# Altium PCB PCB.PcbDoc
Units mm, origin at the board's own origin, x right, y up, seen from the top; angles counter-clockwise.
Board outline 45 x 45 mm, 2 copper layers (Top Layer, Bottom Layer); 38 components, 25 nets, 182 pads, 104 vias.
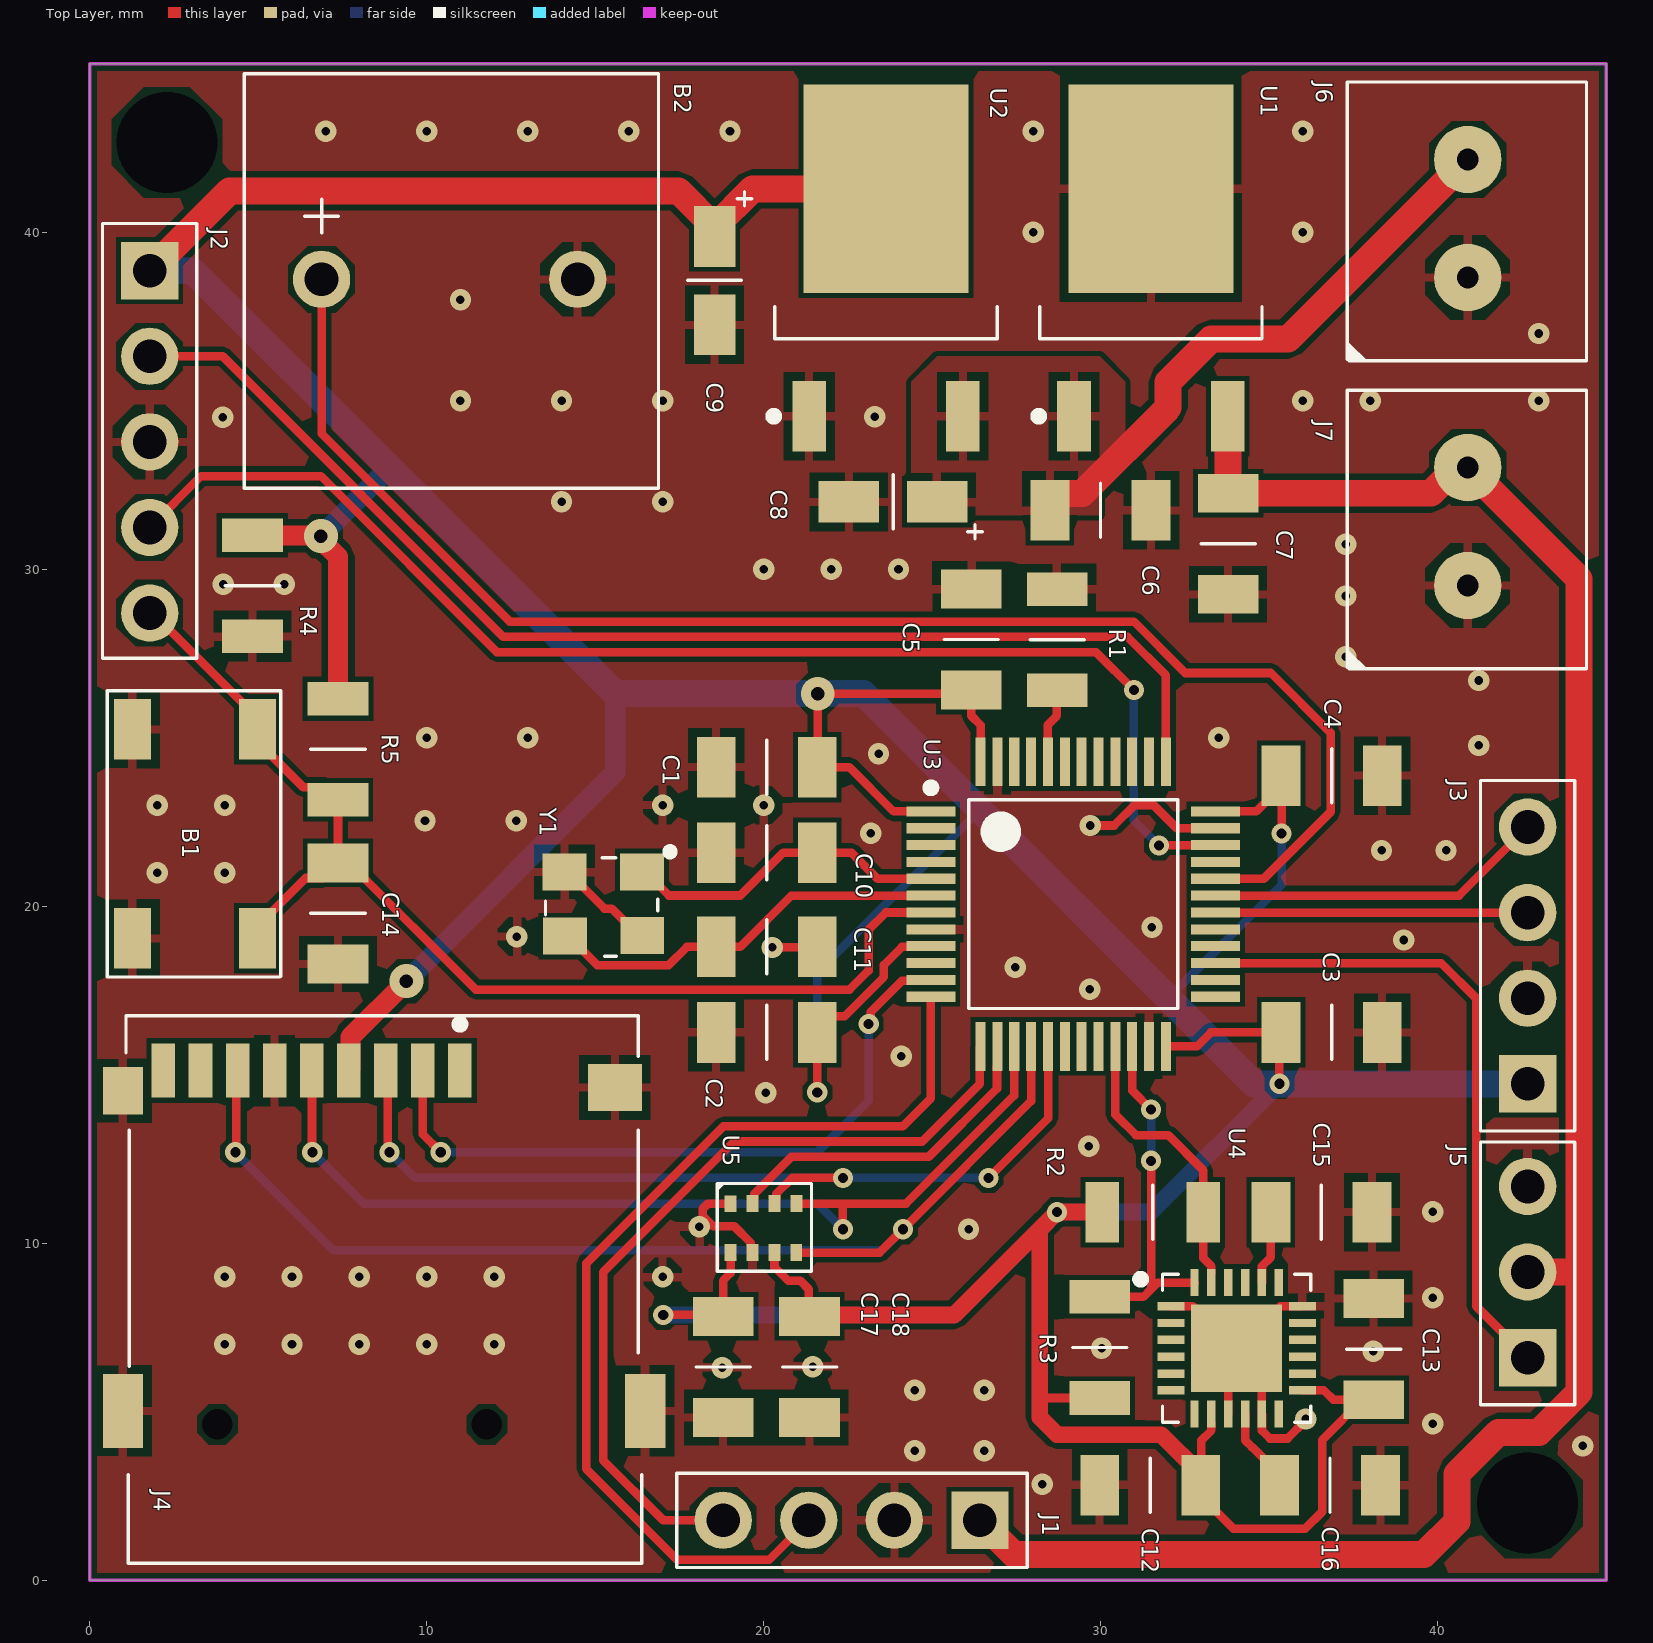
[diagram p0: Top Layer view]
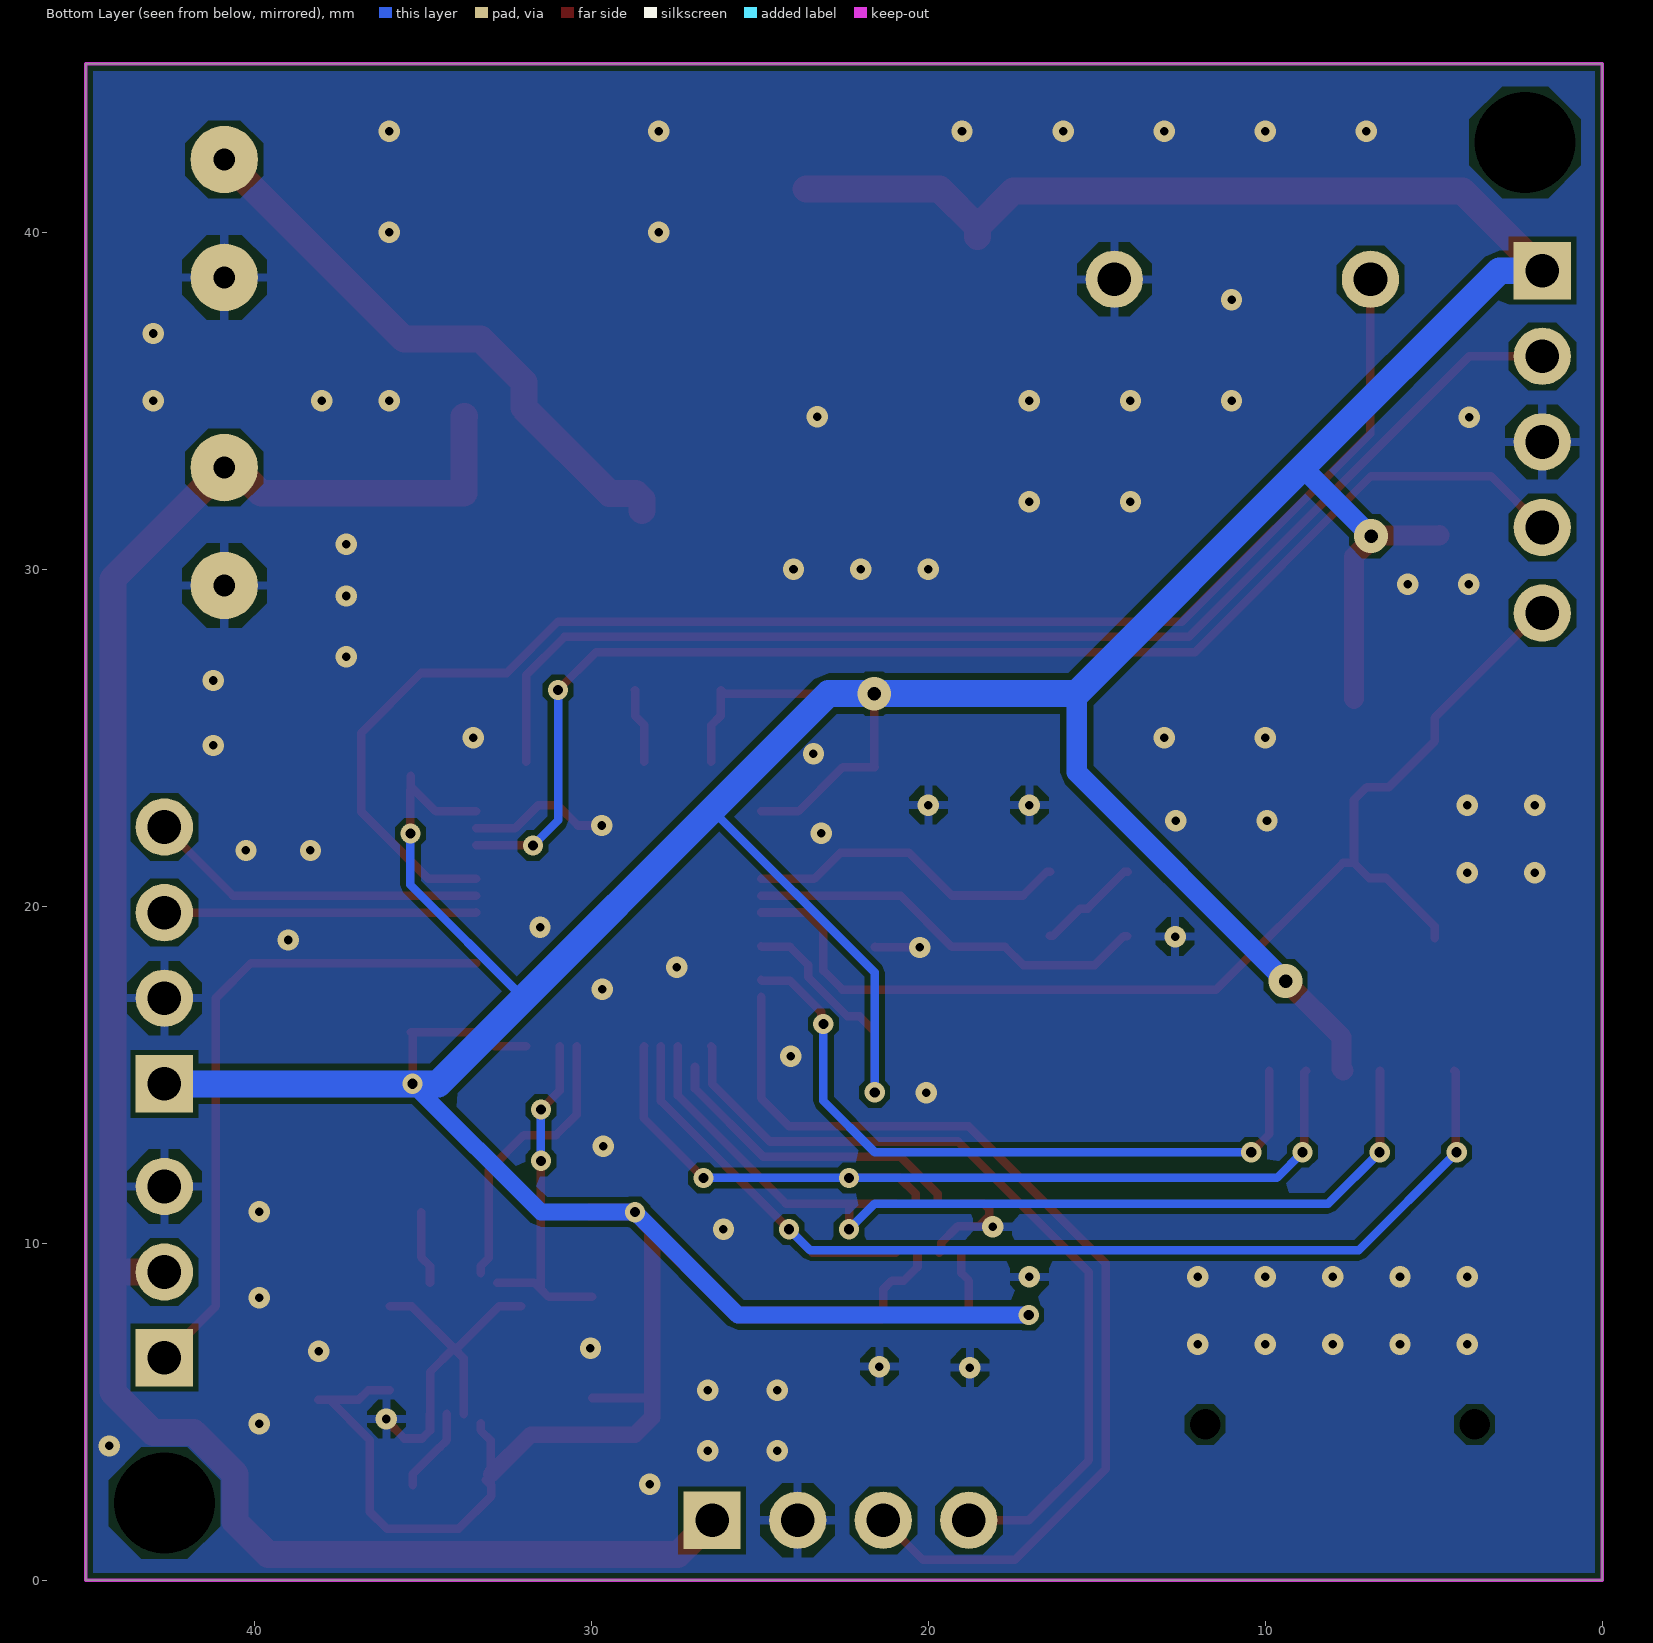
[diagram p1: Bottom Layer view, seen from below]
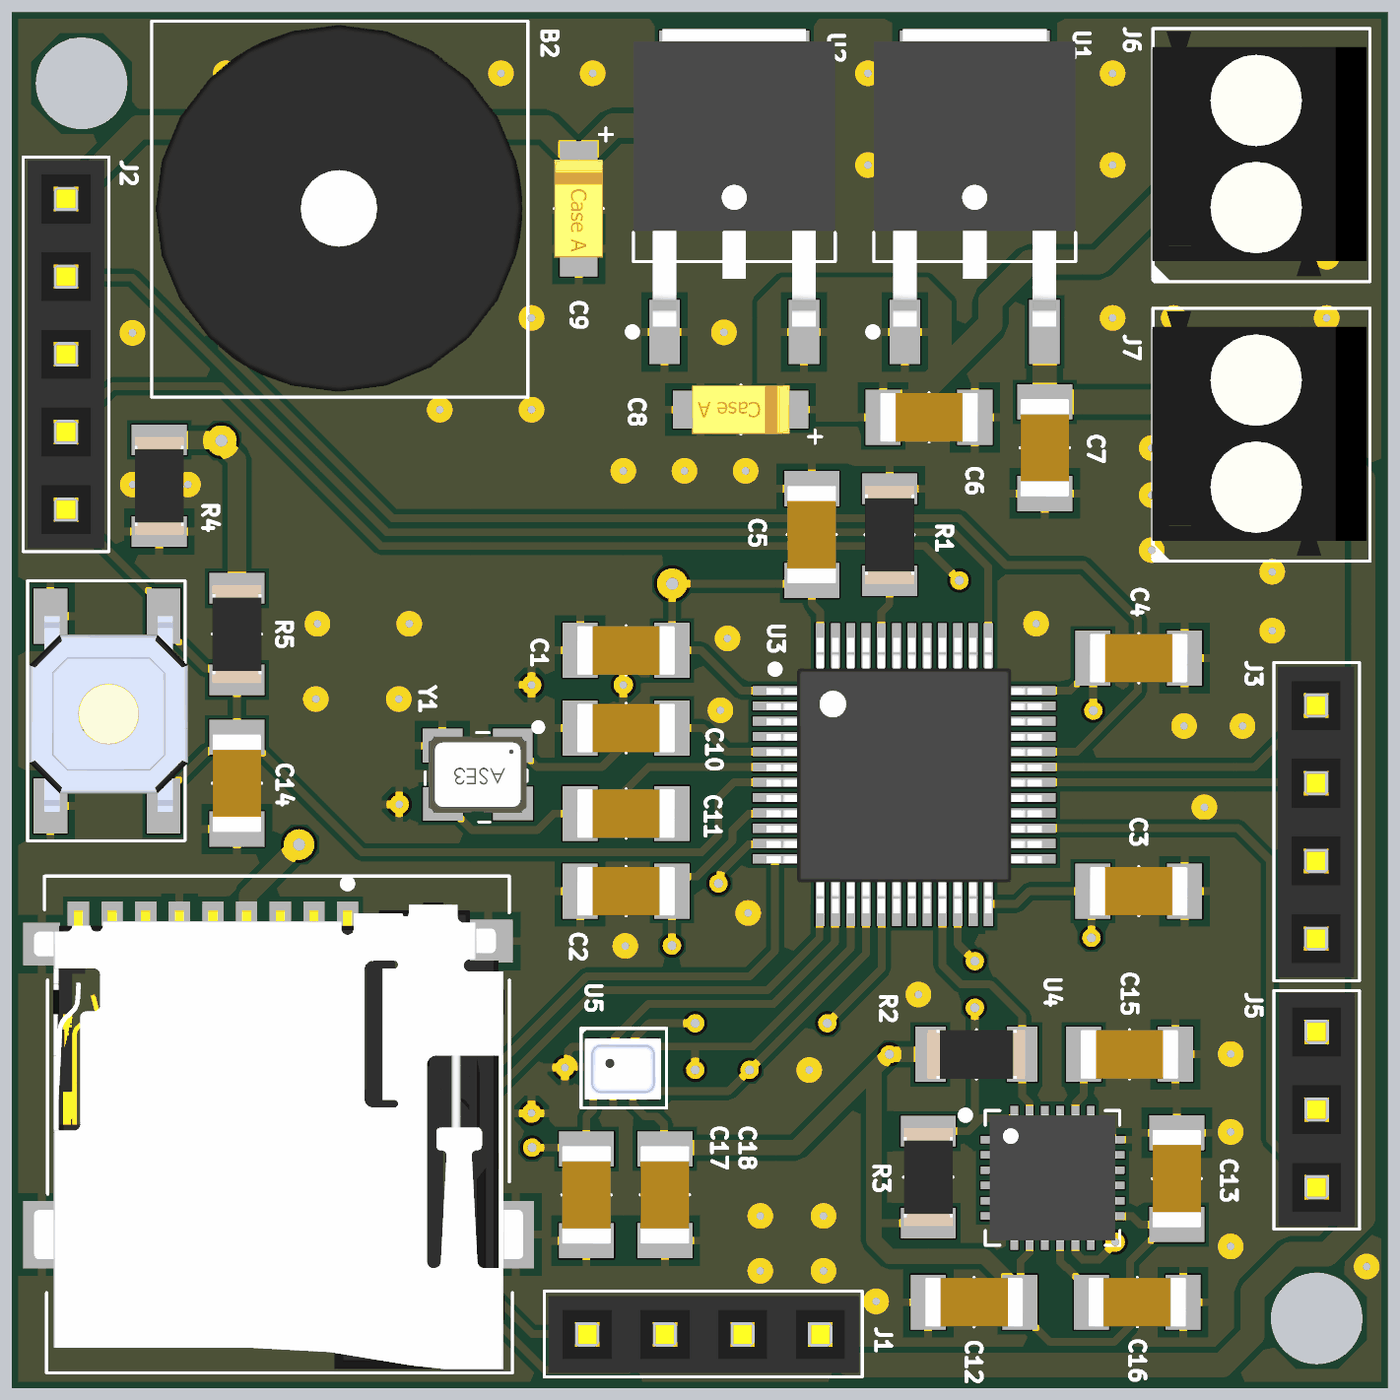
[diagram p2: 3D render of the assembled board from above, using the file's embedded part models]

## Layer stack, top to bottom
Top Solder: solder mask 0.0102, Solder Resist, Dk 3.5
Top Layer: signal copper 0.0356
Dielectric 1: dielectric 0.32, FR-4, Dk 4.8
Bottom Layer: signal copper 0.0356
Bottom Solder: solder mask 0.0102, Solder Resist, Dk 3.5

## Board outline
0,0 45,0 45,45 0,45

## Design rules (kind name [scope] priority, off if disabled: settings)
Clearance [All] p1: gap=0.152 ignorepadtopadclearanceinfootprint=FALSE
HoleSize [All] p1: absolutevalues=TRUE maxlimit=3.1 minlimit=0.025 maxpercent=80.000 minpercent=20.000
MinimumSolderMaskSliver [All] p1: minsoldermaskwidth=0.1
PolygonConnect [All] p1: connectstyle=Relief reliefconductorwidth=0.254 reliefentries=4 polygonreliefangle="90 Angle" airgapwidth=0.254
RoutingVias [All] p1: holewidth=0.3 width=0.6 viastyle="Through Hole" minholewidth=0.2 minwidth=0.2 maxholewidth=0.9 maxwidth=1.27
SolderMaskExpansion [All] p1: expansion=0.102 istentingtop=FALSE
Width [All] p1: maxlimit=1 minlimit=0.254 preferedwidth=0.3 minimp=50.000000 maximp=50.000000 favimp=50.000000
28 further rules are at their usual default settings.

## Components (designator, comment, footprint, x,y, rotation, side; value= is the part's Value field where it differs from the comment)
B1 "Push Button" "PUSB BUTTON-SMD" 1.27,19.05 r90 top
B2 "BUZZER 5v" "BUZZER 5v" 6.878,38.608 r0 top
C1 "0.1 uF" C1206 21.59,24.13 r180 top
C2 "0.1 uF" C1206 21.59,16.256 r180 top
C3 "0.1 uF" C1206 35.354,16.256 r0 top
C4 "0.1 uF" C1206 35.354,23.876 r0 top
C5 "0.1 uF" C1206 26.162,26.416 r90 top
C6 "330 nF C1206" C1206 28.496,31.75 r0 top
C7 "330 nF C1206" C1206 33.782,32.258 r270 top
C8 "10 uF TANTAL" "C1206 - TANTAL" 25.146,32.004 r180 top
C9 "10 uF TANTAL" "C1206 - TANTAL" 18.542,39.878 r270 top
C10 "16 pF" C1206 21.59,21.59 r180 top
C11 "16 pF" C1206 18.59,18.796 r0 top
C12 "0.1 uF" C1206 32.972,2.818 r180 top
C13 "0.1 uF" C1206 38.1,5.358 r90 top
C14 "0.1 uF C1206" C1206 7.366,21.288 r270 top
C15 "2.2 nF" C1206 35.052,10.922 r0 top
C16 "0.1 uF" C1206 35.306,2.818 r0 top
C17 "0.1 uF" C1206 18.796,7.826 r270 top
C18 "0.1 uF" C1206 21.36,7.829 r270 top
J1 "HEADER 2.54mm 1x4" "HEADER 2.54mm 1x4" 26.416,1.778 r180 top
J2 "HEADER 2.54mm 1x5" "HEADER 2.54mm 1x5" 1.778,38.862 r270 top
J3 "HEADER 2.54mm 1x4" "HEADER 2.54mm 1x4" 42.672,14.732 r90 top
J4 "MICRO SD CARD HOLDER" "MICRO SD CARD HOLDER" 0.05,0.05 r0 top
J5 "HEADER 2.54mm 1x3" "HEADER 2.54mm 1x3" 42.672,6.604 r90 top
J6 "KLEMENS 1x2 - 3.5mm" "KLEMENS 1x2 - 3.5mm" 44.769,35.814 r90 top
J7 "KLEMENS 1x2 - 3.5mm" "KLEMENS 1x2 - 3.5mm" 44.769,26.67 r90 top
R1 "10k R1206" "R1206 RESISTOR" 28.709,26.436 r90 top
R2 "4.7k" "R1206 RESISTOR" 33.02,10.922 r180 top
R3 "4.7k" "R1206 RESISTOR" 29.972,8.382 r270 top
R4 "10k" "R1206 RESISTOR" 4.826,30.988 r270 top
R5 "10k R1206" "R1206 RESISTOR" 7.366,23.187 r90 top
U1 "L7805-DPAK" DPAK228P972X240-3N 31.49,38.944 r90 top
U2 "LD108633-DPAK" DPAK228P972X240-3N 23.628,38.944 r90 top
U3 "STM32F101" LQPF48_STM 29.186,20.066 r0 top
U4 "MPU6050" QFN50P400X400X95_HS-25N 34.036,6.882 r0 top
U5 "BMP280" BMP280 19.018,11.171 r90 top
Y1 "8 MHz 12.5 pf Osc" "8 MHZ Osc." 15.24,20.066 r180 top

## Footprints (in the part's own frame and the unit in brackets; to place one, negate y for a bottom-side part, rotate by r counter-clockwise, add the part's x,y. Pads: shape width x height; smd on the part's side, far side on the other; paste and mask are expansions set on the pad)
"8 MHZ Osc." [mm]
  rect 1.3x1.1 smd mask+0.05: 1(-1.148,-0.954) 2(1.152,-0.954) 3(1.137,0.954) 4(-1.152,0.937)
  silkscreen extent -2.08,-1.65 1.72,1.55, body extent -1.6,-1.25 1.6,1.25, height 1.22
BMP280 [mm]
  rect 0.5x0.35 smd mask+0.05: 1(0,0) 2(0.005,-0.652) 3(0.005,-1.302) 4(0.005,-1.952) 5(-1.45,-1.95) 6(-1.45,-1.3) 7(-1.45,-0.65) 8(-1.45,0)
  silkscreen extent -2,-2.4 0.6,0.4, body extent -1.72,-2.22 0.28,0.28, height 0.95
"BUZZER 5v" [mm]
  round 1.7 hole 1: 1(0,0) 2(7.6,0)
  silkscreen extent -2.3,-6.2 10,6.1, body extent -2.18,-6.02 9.82,5.98, height 9.5
C1206 [mm]
  rect 1.15x1.8 smd mask+0.05: 1(0,0) 2(3,0)
  silkscreen extent 1.5,-0.8 1.5,0.8, body extent -0.1,-0.8 3.1,0.8, height 1
"C1206 - TANTAL" [mm]
  rect 1.8x1.23 smd mask+0.05: 1(0,0) 1(0,0) 2(2.62,0)
  silkscreen extent -1.34,-0.8 1.3,1.1, body extent -0.3,-0.8 2.9,0.8, height 1.62
DPAK228P972X240-3N [mm] "D-PAK, 3-Pads, Body 6.20x6.66mm (max), IPC Medium Density"
  rect 2.1x1 smd mask+0.05: 1(-4.4,2.28) 2(-4.4,-2.28)
  rect 6.2x4.9 smd mask+0.05: 3(2.35,0)
  silkscreen extent -4.52,-3.3 -1.15,3.45, body extent -4.22,-3.3 5.5,3.3, height 3.3
"HEADER 2.54mm 1x3" [mm]
  rect 1.7x1.7 hole 1: 1(0,0)
  round 1.7 hole 1: 2(2.54,0) 3(5.08,0)
  silkscreen extent -1.4,-1.4 6.4,1.4, body extent -1.3,-1.25 6.32,1.25, height 8.6
"HEADER 2.54mm 1x4" [mm]
  rect 1.7x1.7 hole 1: 1(0,0)
  round 1.7 hole 1: 2(2.54,0) 3(5.08,0) 4(7.62,0)
  silkscreen extent -1.4,-1.4 9,1.4, body extent -1.3,-1.23 8.86,1.27, height 8.6
"HEADER 2.54mm 1x5" [mm]
  rect 1.7x1.7 hole 1: 1(0,0)
  round 1.7 hole 1: 2(2.54,0) 3(5.08,0) 4(7.62,0) 5(10.16,0)
  silkscreen extent -1.4,-1.4 11.5,1.4, body extent -1.3,-1.25 11.4,1.25, height 8.6
"KLEMENS 1x2 - 3.5mm" [mm]
  round 2 hole 0.65: 1(2.85,3.875) 2(6.35,3.875)
  silkscreen extent 0.34,0.35 8.65,7.5, body extent 0.55,0.48 8.54,7.48, height 8.9
LQPF48_STM [mm] "TSQFP, 48-Leads, Body 7.00x7.00mm, Pitch 0.50mm, IPC Medium Density"
  rect 1.45x0.3 smd mask+0.05: 1(-4.225,2.75) 2(-4.225,2.25) 3(-4.225,1.75) 4(-4.225,1.25) 5(-4.225,0.75) 6(-4.225,0.25) 7(-4.225,-0.25) 8(-4.225,-0.75) 9(-4.225,-1.25) 10(-4.225,-1.75) 11(-4.225,-2.25) 12(-4.225,-2.75) 25(4.225,-2.75) 26(4.225,-2.25) 27(4.225,-1.75) 28(4.225,-1.25) 29(4.225,-0.75) 30(4.225,-0.25) 31(4.225,0.25) 32(4.225,0.75) 33(4.225,1.25) 34(4.225,1.75) 35(4.225,2.25) 36(4.225,2.75)
  rect 0.3x1.45 smd mask+0.05: 13(-2.75,-4.225) 14(-2.25,-4.225) 15(-1.75,-4.225) 16(-1.25,-4.225) 17(-0.75,-4.225) 18(-0.25,-4.225) 19(0.25,-4.225) 20(0.75,-4.225) 21(1.25,-4.225) 22(1.75,-4.225) 23(2.25,-4.225) 24(2.75,-4.225) 37(2.75,4.225) 38(2.25,4.225) 39(1.75,4.225) 40(1.25,4.225) 41(0.75,4.225) 42(0.25,4.225) 43(-0.25,4.225) 44(-0.75,4.225) 45(-1.25,4.225) 46(-1.75,4.225) 47(-2.25,4.225) 48(-2.75,4.225)
  silkscreen extent -4.35,-3.1 3.1,3.57, body extent -4.5,-4.53 4.5,4.47, height 1.6
"MICRO SD CARD HOLDER" [mm]
  rect 0.7x1.6 smd paste+0 mask+0: 1(10.934,15.075) 2(9.834,15.075) 3(8.734,15.075) 4(7.634,15.075) 5(6.534,15.075) 6(5.434,15.075) 7(4.334,15.075) 8(3.234,15.075) Cd(2.134,15.075)
  rect 1.2x1.4 smd paste+0 mask+0: 10(0.934,14.475)
  rect 1.6x1.4 smd paste+0 mask+0: 11(15.534,14.575)
  rect 1.2x2.2 smd paste+0 mask+0: 12(0.934,4.975) 13(16.434,4.975)
  round 0 hole 0.9 unplated paste-1000 mask+0: ""(3.734,4.575) ""(11.734,4.575)
  silkscreen extent 1.03,0.45 16.33,16.7, body extent 0.68,0.58 16.68,15.83, height 1.85
"PUSB BUTTON-SMD" [mm]
  rect 1.8x1.1 smd mask+0.05: 1(0,0) 2(6.2,0) 3(0,-3.7) 4(6.2,-3.7)
  silkscreen extent -1.15,-4.4 7.35,0.75, body extent -0.2,-4.5 6.2,0.7, height 1.5
QFN50P400X400X95_HS-25N [mm] "QFN, 24-Leads, Body 4.00x4.00mm, Pitch 0.50mm, Thermal Pad 2.70x2.60mm, IPC Medium Density"
  rect 0.8x0.25 smd paste+0 mask+0.05: 1(-1.95,1.25)
  rect 0.8x0.25 smd mask+0.05: 2(-1.95,0.75) 3(-1.95,0.25) 4(-1.95,-0.25) 5(-1.95,-0.75) 6(-1.95,-1.25) 13(1.95,-1.25) 14(1.95,-0.75) 15(1.95,-0.25) 16(1.95,0.25) 17(1.95,0.75) 18(1.95,1.25)
  rect 0.25x0.8 smd mask+0.05: 7(-1.25,-1.95) 8(-0.75,-1.95) 9(-0.25,-1.95) 10(0.25,-1.95) 11(0.75,-1.95) 12(1.25,-1.95) 19(1.25,1.95) 20(0.75,1.95) 21(0.25,1.95) 22(-0.25,1.95) 23(-0.75,1.95) 24(-1.25,1.95)
  rect 2.7x2.6 smd mask+0.05: 25(0,0)
  silkscreen extent -2.97,-2.2 2.2,2.2, body extent -2.06,-2.06 2.06,2.06, height 0.95
"R1206 RESISTOR" [mm]
  rect 1x1.8 smd mask+0.05: 1(-0.025,0) 2(2.975,0)
  silkscreen extent 1.48,-0.8 1.48,0.81, body extent -0.12,-0.8 3.08,0.81, height 0.55

## Part data
B1: "Smd Push Button", Satın Alma Linki=https://urun.n11.com/diger/mini-pushbutton-switch-smd-P227461537?gclid=Cj0KCQjwkoDmBRCcARIsAG3xzl8Y_-jeD7HocNM6lvuZ_rVp83568XPGtNzlPwXWLph8oCRqo0yh87UaApZYEALw_wcB&gclsrc=aw.ds
C1 C2 C3 C4 C5 C12 C13 C16 C17 C18: library part "0.1 uF C1206", "0.1 uF C1206"
C8 C9: "10 uF C1206 - TANTAL"
C15: "2.2 nF C1206"
J4: "MICRO SD CARD HOLDER KLS1-TF-003 Micro SD Card Connector"
R2 R3: "4.7k R1206"
R4: "10k R1206"
U1: "L7805 5V REGULATOR SMD PACKET"
U2: "LD108633 3.3V REGULATOR DPAK"
U3: "STM32F101 48PIN MICROPROCESSOR"
U4: "MPU GYRO"
U5: "BMP280 PRESSURE"

## Free pads (board coordinates)
  round 0 hole 3 unplated: ""(2.286,42.672) ""(42.672,2.286)

## Via types
v1: diameter 0.635, hole 0.254, Top Layer to Bottom Layer, 83 vias
v2: diameter 0.6, hole 0.3, Top Layer to Bottom Layer, 18 vias
v3: diameter 1, hole 0.4, Top Layer to Bottom Layer, 3 vias

## Nets (pads, with @x,y where several pads share a name; then routed paths per layer and width w, separated by ;. In a path a pad name is that pad's centre, name@x,y a point inside that pad or via, vN(x,y) a via of type N, cw(c..) or ccw(c..) an arc to the next point about the centre after c; other vN are vias at no path point)
3.3V: C1.1 C2.1 C3.1 C4.1 C5.1 C9.1 C12.1 C13.1 C17.1 C18.1 J2.1 J3.1 J4.4 R2.2 R3.2 R4.1 R5.2 U2.3 U3.1 U3.9 U3.24 U3.36 U3.48 U4.8 U4.13 U5.6 U5.8 | length 207.5
  Top Layer w0.254: v2(17.018,7.874) 18.748,7.874 C17.1 18.796,8.89 19.018,9.112 U5.8 ; U5.6 20.32,9.719 20.32,9.293 20.723,8.89 21.082,8.89 21.336,8.636 21.336,7.853 C18.1 C18.1@21.406,7.874 ; v2(21.59,14.478) 21.59,16.284 22.038,16.732 22.397,16.732 23.568,17.902 23.568,18.26 24.1,18.793 24.938,18.793 U3.9 ; U3.1 23.855,22.816 22.541,24.13 C1.1 21.6,24.14 v3(21.6,26.31) 26.057,26.31 C5.1 26.162,25.654 26.438,25.378 26.438,24.293 U3.48 ; 28.194,5.407 R3.2 ; U3.24 32.859,15.841 33.274,16.256 C3.1 35.306,16.208 v2(35.306,14.732) ; C12.1@33.135,2.981 C12.1@32.987,2.833 ; U4.8@33.286,4.659 33.286,4.445 32.987,4.145 C12.1@32.987,2.833 ; U3.36 34.619,22.816 C4.1@35.306,23.503 ; C4.1 35.354,23.551 C4.1@35.306,23.503 ; v2(35.368,22.161) 35.368,23.441 C4.1@35.306,23.503 ; U4.13 36.627,5.632 36.901,5.358 C13.1@37.775,5.358 ; C13.1 C13.1@37.775,5.358 ; C12.1@32.987,2.833 C12.1 32.972,2.493 33.941,1.524 36.068,1.524 36.576,2.032 36.576,4.159 C13.1@37.775,5.358
  Top Layer w0.5: C18.1@21.406,7.874 25.654,7.874 28.194,10.414 ; R2.2 v2(28.702,10.922) 28.194,10.414 ; C12.1@32.972,3.143 31.797,4.318 28.702,4.318 28.194,4.826 28.194,5.407 28.194,10.414
  Top Layer w0.6: R4.1 4.838,31 6.846,31 v3(6.858,30.988) 6.858,30.88 7.366,30.372 R5.2 ; J4.4 7.734,15.175 7.734,16.116 v3(9.398,17.78)
  Top Layer w0.8: J2.1 4.151,41.235 17.47,41.235 C9.1@18.542,40.163 ; C9.1@18.542,39.878 C9.1@18.542,40.163 ; U2.3 19.673,41.294 C9.1@18.542,40.163
  Bottom Layer w0.254: v2(21.59,14.478) 21.59,18.034 26.416,22.86 ; 32.004,17.272 35.368,20.636 v2(35.368,22.161)
  Bottom Layer w0.5: v2(17.018,7.874) 25.654,7.874 v2(28.702,10.922) 31.496,10.922 v2(35.306,14.732)
  Bottom Layer w0.6: v3(6.858,30.988) 8.89,33.02 ; v3(9.398,17.78) 15.592,23.974 15.592,26.318
  Bottom Layer w0.8: J2.1 3.048,38.862 8.89,33.02 15.592,26.318 22.958,26.318 26.416,22.86 32.004,17.272 34.544,14.732 v2(35.306,14.732) J3.1
5V: C7.1 J1.1 J5.2 J7.2 U1.2 | length 61.1
  Top Layer w0.8: J1.1 27.432,0.762 39.59,0.762 40.572,1.744 40.572,3.156 41.802,4.386 43.003,4.386 44.196,5.579 44.196,9.144 ; U1.2 33.776,34.538 33.776,32.264 C7.1 39.807,32.258 40.569,33.02 J7.2 44.196,29.718 44.196,9.144 ; J5.2 44.196,9.144
7.4V: C6.1 C8.1 J6.2 U1.1 U2.2 | length 17.3
  Top Layer w0.8: C6.1 28.496,32.075 28.671,32.25 29.456,32.25 32.004,34.798 32.004,35.56 33.274,36.83 35.56,36.83 J6.2
GND: B1.1 B1.2 B2.2 C1.2 C2.2 C3.2 C4.2 C5.2 C6.2 C7.2 C8.2 C9.2 C10.2 C11.2 C12.2 C13.2 C14.2 C15.2 C16.2 C17.2 C18.2 J1.2 J2.3 J3.2 J4.6 J4.10 J4.11 J4.12 J4.13 J5.3 J6.1 J7.1 R1.2 R4.2 U1.3 U2.1 U3.8 U3.23 U3.35 U3.47 U4.1 U4.9 U4.11 U4.18 U4.25 U5.1 U5.7 Y1.2 Y1.4 | length 23.3
  Top Layer w0.254: Y1.2 14.188,21.02 15.275,19.933 15.488,19.933 16.292,19.129 Y1.4 ; U5.1 18.337,11.171 18.188,11.022 18.188,10.812 18.497,10.503 19.123,10.503 19.62,10.006 19.62,9.769 U5.7 ; v1(20.256,18.778) 21.572,18.778 C11.2 ; v1(29.688,22.397) 30.397,22.397 31,23 31.576,23 32.26,22.316 U3.35 ; U4.1 32.736,8.132 33.986,6.882 U4.25@34.086,6.882 ; U4.9 33.786,6.582 U4.25@34.086,6.882 ; U4.18 35.984,8.13 35.334,8.13 U4.25@34.086,6.882 ; v1(36.085,4.783) 36.085,4.743 35.546,4.205 35.026,4.205 34.788,4.443 34.788,4.93 U4.11 34.786,6.182 U4.25@34.086,6.882
  other v1: 28.266,2.844 24.48,3.842 26.547,3.842 44.307,3.983 39.861,4.641 24.48,5.637 26.547,5.637 18.765,6.309 21.453,6.336 38.093,6.795 30.026,6.877 4,7 6,7 8,7 10,7 12,7 39.861,8.383 4,9 6,9 8,9 10,9 12,9 17,9 26.079,10.409 18.093,10.488 39.861,10.933 29.651,12.877 20.064,14.467 24.082,15.544 29.677,17.542 27.465,18.189 39,19 12.673,19.097 31.522,19.376 2,21 4,21 38.336,21.657 40.25,21.657 23.176,22.172 9.947,22.54 12.659,22.54 2,23 4,23 17,23 20,23 23.408,24.522 41.219,24.773 10,25 13,25 33.5,25.004 41.219,26.7 37.278,27.411 37.278,29.209 3.961,29.554 5.766,29.554 20,30 22,30 24,30 37.278,30.748 14,32 17,32 3.95,34.511 23.291,34.53 11,35 14,35 17,35 36,35 38,35 43,35 43,37 11,38 28,40 36,40 7,43 10,43 13,43 16,43 19,43 28,43 36,43
NetB1_3: B1.3 B1.4 C14.1 J2.5 R5.1 U3.7 | length 34.5
  Top Layer w0.254: J2.5 1.868,28.702 4.97,25.6 B1.4 4.97,24.9 6.335,23.535 6.993,23.535 R5.1 C14.1 ; B1.3 4.97,19.4 6.41,20.84 6.918,20.84 C14.1 ; U3.7 23.626,19.816 23.114,19.304 23.114,18.091 22.549,17.526 11.453,17.526 7.691,21.288 C14.1
NetB2_1: B2.1 U3.32 | length 44.8
  Top Layer w0.254: B2.1 6.878,34.03 12.46,28.448 30.988,28.448 32.512,26.924 35.052,26.924 36.83,25.146 36.83,22.804 34.842,20.816 U3.32
NetC10_1: C10.1 U3.5 Y1.1 | length 9.7
  Top Layer w0.254: Y1.1 16.488,21.02 17.187,20.32 19.304,20.32 20.574,21.59 C10.1 22.606,21.59 23.38,20.816 U3.5
NetC11_1: C11.1 U3.6 Y1.3 | length 12.1
  Top Layer w0.254: Y1.3 14.203,19.112 15.064,18.252 17.178,18.252 17.722,18.796 C11.1 19.304,18.796 20.824,20.316 U3.6
NetC15_1: C15.1 U4.20 | length 2.2
  Top Layer w0.254: U4.20 34.788,8.834 34.788,9.321 35.052,9.585 C15.1
NetC16_1: C16.1 U4.10 | length 2.5
  Top Layer w0.254: U4.10 34.286,4.151 34.487,3.95 34.499,3.95 35.306,3.143 C16.1
NetJ1_3: J1.3 U3.12 | length 29.6
  Top Layer w0.254: J1.3 20.159,0.601 17.433,0.601 14.732,3.302 14.732,9.398 18.807,13.473 24.13,13.473 24.961,14.304 U3.12
NetJ1_4: J1.4 U3.13 | length 24.5
  Top Layer w0.254: J1.4 17.018,1.778 15.24,3.556 15.24,9.144 19.115,13.019 24.703,13.019 26.416,14.732 26.416,15.821 U3.13
NetJ2_2: J2.2 U3.37 | length 36.6
  Top Layer w0.254: J2.2 3.944,36.322 12.272,27.994 30.8,27.994 31.936,26.858 U3.37
NetJ2_4: J2.4 U3.34 | length 39.1
  Top Layer w0.254: J2.4 3.302,32.766 6.858,32.766 12.084,27.54 29.864,27.54 v2(30.988,26.416) ; v2(31.729,21.807) 31.733,21.811 33.406,21.811 U3.34
  Bottom Layer w0.254: v2(30.988,26.416) 30.988,22.548 v2(31.729,21.807)
NetJ3_3: J3.3 U3.30 | length 9.3
  Top Layer w0.254: U3.30 33.413,19.814 42.67,19.814 J3.3 ; J3.3@43.178,19.814 J3.3@43.18,19.812
NetJ3_4: J3.4 U3.31 | length 10.1
  Top Layer w0.254: U3.31 40.636,20.316 J3.4
NetJ4_2: J4.2 U3.11 | length 20.8
  Top Layer w0.254: J4.2 9.884,13.23 v2(10.414,12.7) ; v2(23.114,16.51) 23.18,16.576 23.18,16.873 24.1,17.793 24.938,17.793 U3.11
  Bottom Layer w0.254: v2(10.414,12.7) 21.59,12.7 23.114,14.224 v2(23.114,16.51)
NetJ4_3: J4.3 U3.17 U5.3 | length 27.7
  Top Layer w0.254: J4.3 8.837,15.072 8.837,12.753 v2(8.89,12.7) ; U5.3 20.368,11.224 20.368,11.461 20.845,11.938 v2(22.352,11.938) ; v2(26.67,11.938) 28.448,13.716 28.448,15.829 U3.17
  Bottom Layer w0.254: v2(8.89,12.7) 9.652,11.938 v2(22.352,11.938) v2(26.67,11.938)
NetJ4_5: J4.5 U3.15 U5.4 | length 29.1
  Top Layer w0.254: J4.5 6.594,15.115 6.594,12.71 v2(6.604,12.7) ; U5.4 22.352,11.176 ; v2(22.352,10.414) 22.352,11.176 ; U3.15 27.432,15.837 27.432,14.381 24.227,11.176 22.352,11.176
  Bottom Layer w0.254: v2(6.604,12.7) 8.128,11.176 21.59,11.176 v2(22.352,10.414)
NetJ4_7: J4.7 U3.16 U5.5 | length 34.2
  Top Layer w0.254: v2(4.318,12.7) 4.351,12.733 4.351,15.092 J4.7 ; U5.5 23.437,9.721 v2(24.13,10.414) 27.936,14.22 U3.16
  Bottom Layer w0.254: v2(4.318,12.7) 7.231,9.787 23.503,9.787 v2(24.13,10.414)
NetJ5_1: J5.1 U3.27 | length 19.5
  Top Layer w0.254: U3.27 40.104,18.316 41.148,17.272 41.148,8.128 J5.1
NetR1_1: R1.1 U3.44 | length 2.2
  Top Layer w0.254: U3.44 28.436,25.388 28.702,25.654 28.702,26.404 R1.1
NetR2_1: R2.1 U3.21 U4.23 | length 8.5
  Top Layer w0.254: U3.21 30.436,13.817 31.045,13.208 32.004,13.208 33.045,12.167 R2.1 33.045,9.56 33.25,9.356 33.286,9.319 U4.23@33.286,9.105
NetR3_1: R3.1 U3.22 U4.24 | length 10.4
  Top Layer w0.254: R3.1 31.267,8.407 31.496,8.636 ; U3.22 30.936,14.53 v2(31.496,13.97) ; v2(31.496,12.446) 31.496,8.636 ; U4.24 31.692,8.832 31.496,8.636
  Bottom Layer w0.254: v2(31.496,12.446) v2(31.496,13.97)
NetU3_14: U3.14 U5.2 | length 9.5
  Top Layer w0.254: U5.2 19.718,11.224 19.718,11.461 20.822,12.565 24.897,12.565 26.924,14.592 U3.14@26.924,15.24
pads on no net: J4. J4.1 J4.8 J4.Cd U3.2 U3.3 U3.4 U3.10 U3.18 U3.19 U3.20 U3.25 U3.26 U3.28 U3.29 U3.33 U3.38 U3.39 U3.40 U3.41 U3.42 U3.43 U3.45 U3.46 U4.2 U4.3 U4.4 U4.5 U4.6 U4.7 U4.12 U4.14 U4.15 U4.16 U4.17 U4.19 U4.21 U4.22

## Polygon pours and split planes (outlines as drawn)
GND on Top Layer "GNDTop" (solid, pour order 1): 0.026,45.156 45.026,45.156 45.026,0.156 0.026,0.156
7.4V on Top Layer "7.4V" (solid, pour order 0): 29.972,31.612 29.972,33.02 30.734,33.782 30.734,35.56 29.972,36.322 25.146,36.322 24.384,35.56 24.384,31.612
GND on Bottom Layer "GNDBot" (solid, pour order 2): 0,45 45,45 45,0 0,0

## Keep-outs
Keep-Out Layer:
  the board outline again, w0.1

## Other copper
Top Layer:
  pour cut-out: 32.688,8.734 31.594,8.734 31.594,13.139 33.045,11.688 33.045,9.091
  pour cut-out: 29,27 29.142,26.858 31.936,26.858 31.936,25.064 32,25 31.839,24.839 28.436,24.839 28.436,26.436